# Altium PCB PCB3.PcbDoc
Units mm, origin at the board's own origin, x right, y up, seen from the top; angles counter-clockwise.
Board outline 95.25 x 46.35 mm, 2 copper layers (Top Layer, Bottom Layer); 134 components, 118 nets, 415 pads, 19 vias.
Unrouted connection lines stored in the file: 2.
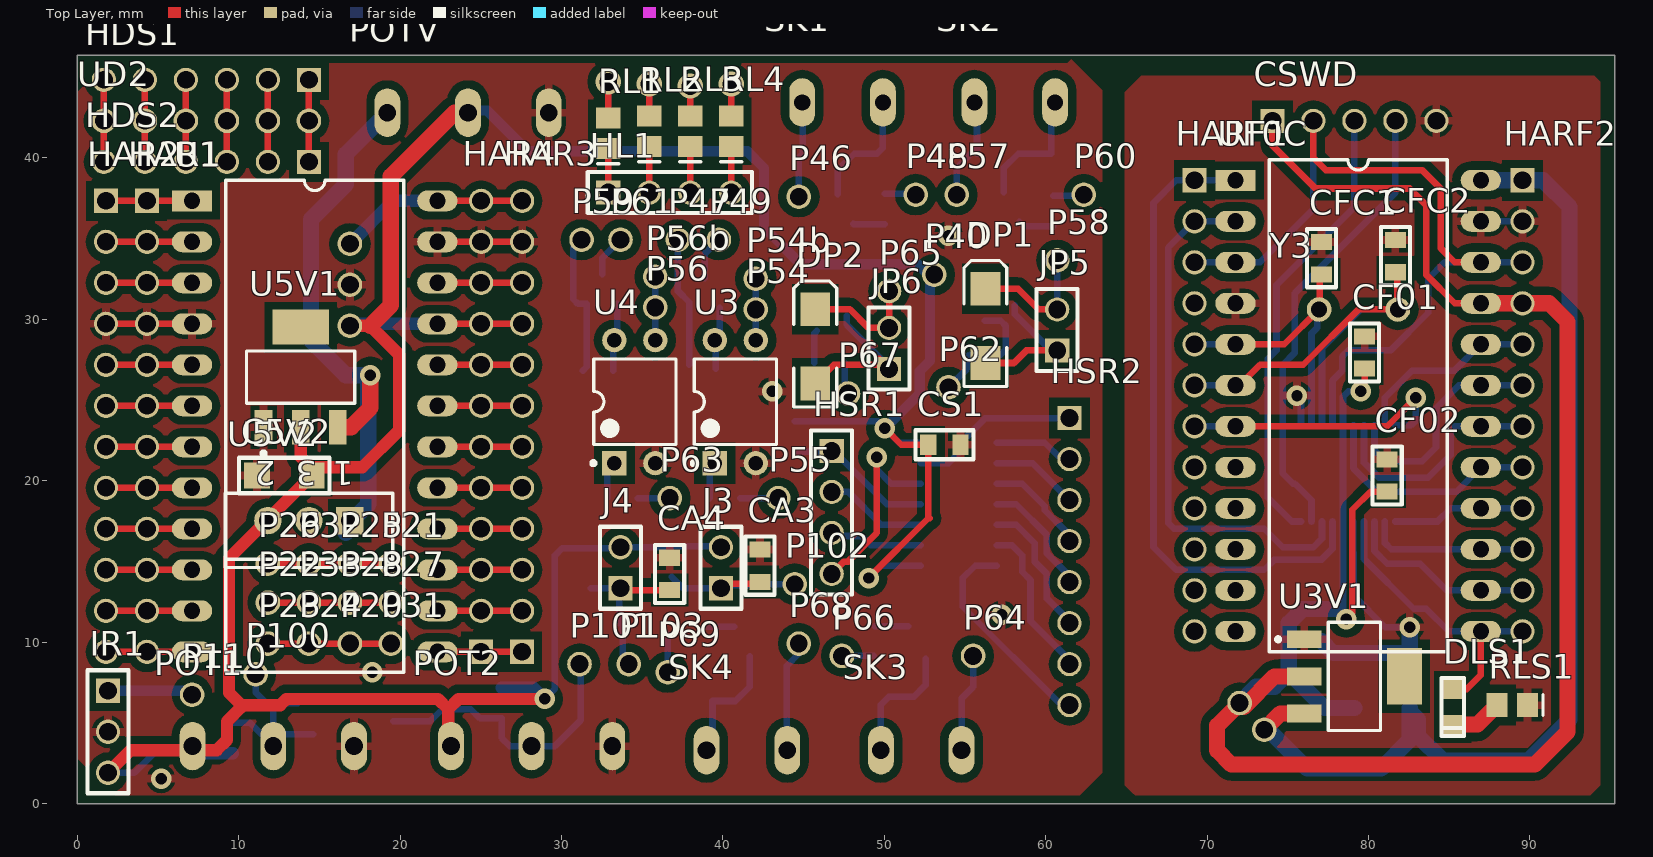
[diagram p0: Top Layer view]
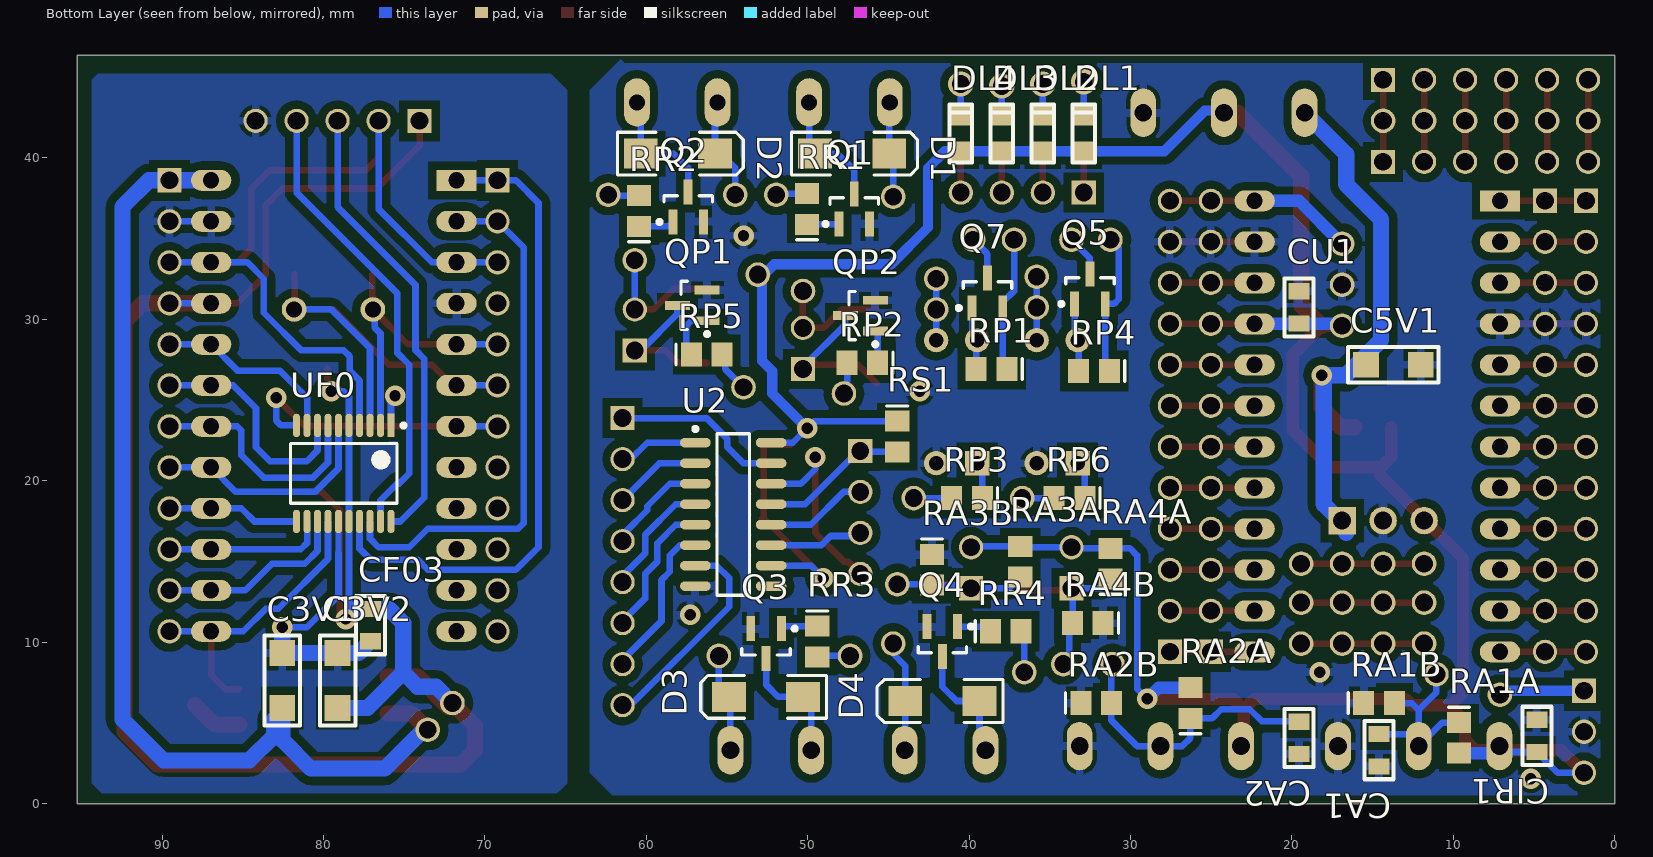
[diagram p1: Bottom Layer view, seen from below]

## Layer stack, top to bottom
Top Solder: solder mask 0.0102, Solder Resist, Dk 3.5
Top Layer: signal copper 0.0356
Dielectric 1: dielectric 0.32, FR-4, Dk 4.8
Bottom Layer: signal copper 0.0356
Bottom Solder: solder mask 0.0102, Solder Resist, Dk 3.5

## Board outline
0,0 95.25,0 95.25,46.355 0,46.355

## Design rules (kind name [scope] priority, off if disabled: settings)
AssemblyTestPointUsage [All] p1 off:
AssemblyTestpoint [All] p1 off: testpointundercomponent=TRUE minsize=1.016 maxsize=2.54 preferedsize=1.524 minholesize=0 maxholesize=1.016 preferedholesize=0.813 testpointgrid=0.025 usegrid=TRUE gridtolerance=0 allowsidetop=TRUE allowsidebottom=TRUE
Clearance [All] p1: gap=0.508
ComponentClearance [All] p1 off: gap=0.254 collisioncheckmode=3 verticalgap=0.254 showdistances=FALSE
DiffPairsRouting [All] p1 off: maxlimit=0.254 minlimit=0.254 mostfreqgap=0.254 toplayer_minwidth=0.381 toplayer_maxwidth=0.381 toplayer_prefwidth=0.381 bottomlayer_minwidth=0.381 bottomlayer_maxwidth=0.381 bottomlayer_prefwidth=0.381 maxuncoupledlength=12.7
FabricationTestPointUsage [All] p1 off: valid=0 allowmultiple=FALSE
FabricationTestpoint [All] p1 off: side=3 testpointundercomponent=TRUE minsize=1.016 maxsize=2.54 preferedsize=1.524 minholesize=0 maxholesize=1.016 preferedholesize=0.813 testpointgrid=0.025 allowsidetop=TRUE allowsidebottom=TRUE usegrid=TRUE gridtolerance=0
FanoutControl Fanout_BGA [IsBGA] p1 off: bgadir=Out bgaviamode=Centered fanoutstyle=Auto fanoutdirection=Alternating viagrid=0.025 // Fanout_BGA (Default Rule)
FanoutControl Fanout_LCC [IsLCC] p2 off: bgadir=Out bgaviamode=Centered fanoutstyle=Auto fanoutdirection=Alternating viagrid=0.025 // Fanout_LCC (Default Rule)
FanoutControl Fanout_SOIC [IsSOIC] p3 off: bgadir=Out bgaviamode=Centered fanoutstyle=Auto fanoutdirection=Alternating viagrid=0.025 // Fanout_SOIC (Default Rule)
FanoutControl Fanout_Small [(CompPinCount < 5)] p4 off: bgadir=Out bgaviamode=Centered fanoutstyle=Auto fanoutdirection=OutThenIn viagrid=0.025 // Fanout_Small (Default Rule)
FanoutControl Fanout_Default [All] p5 off: bgadir=Out bgaviamode=Centered fanoutstyle=Auto fanoutdirection=Alternating viagrid=0.025 // Fanout_Default (Default Rule)
Height [All] p1 off: minheight=0 maxheight=25.4 prefheight=12.7
HoleSize [All] p1 off: absolutevalues=TRUE maxlimit=2.54 minlimit=0.025 maxpercent=80.000 minpercent=20.000
HoleToHoleClearance [All] p1 off: gap=0.254 allowstackedmicrovias=TRUE
LayerPairs [All] p1 off: enforce=TRUE
MinimumSolderMaskSliver [All] p1 off: minsoldermaskwidth=0.254
NetAntennae [All] p1 off: netantennaetolerance=0
PasteMaskExpansion [All] p1 off: expansion=0
PlaneConnect [All] p1: planeconnectstyle=Relief reliefexpansion=0.508 reliefentries=4 reliefconductorwidth=0.508 reliefairgap=0.254
PolygonConnect [All] p1: connectstyle=Relief reliefconductorwidth=0.508 reliefentries=4 polygonreliefangle="90 Angle" airgapwidth=0.254
RoutingCorners [All] p1 off: cornerstyle=45-Degree minsetback=2.54 maxsetback=2.54
RoutingLayers [All] p1 off: top layer_v5=TRUE bottom layer_v5=TRUE
RoutingPriority [All] p1 off: routingpriority=0
RoutingTopology [All] p1 off: topology=Shortest
RoutingVias [All] p1 off: holewidth=0.711 width=1.27 viastyle="Through Hole" minholewidth=0.711 minwidth=1.27 maxholewidth=0.711 maxwidth=1.27
SilkToBoardRegionClearance [All] p1 off:
SilkToSilkClearance [All] p1 off: silktosilkclearance=0.254
SilkToSolderMaskClearance [IsPad] p1 off: minsilkscreentomaskgap=0.254 clearancetoexposedcopper=TRUE
SolderMaskExpansion [All] p1 off: expansion=0.102
UnRoutedNet [All] p1 off:
UnpouredPolygon [All] p1 off: allowunpoured=FALSE
Width [All] p1: maxlimit=1.27 minlimit=0.406 preferedwidth=0.406
2 further rules are at their usual default settings.

## Classes and differential pairs
component class Sheet2: CA1 CA2 CA3 CA4 D1 D2 D3 D4 DL1 DL2 DL3 DL4 DP1 DP2 HL1 J3 J4 JP5 JP6 P46 P47 P48 P49 P54 P54b P55 P56 P56b P57 P58 P59 P60 P61 P62 P63 P64 P65 P66 P67 P68 P69 P100 P101 P102 P103 POT2 POTV Q1 Q2 Q3 Q4 Q5 Q7 QP1 QP2 RA1A RA1B RA2A RA2B RA3A RA3B RA4A RA4B RL1 RL2 RL3 RL4 RP1 RP2 RP3 RP4 RP5 RP6 RR1 RR2 RR3 RR4 SK1 SK2 SK3 SK4 U3 U4
component class Sheet1: C5V1 C5V2 CIR1 CS1 CU1 HAR1 HAR2 HAR3 HAR4 HDS1 HDS2 HSR1 HSR2 IR1 P20 P21 P22 P23 P24 P25 P26 P27 P28 P31 P32 P33 P40 P110 POTV RS1 U1 U2 U5V1 U5V2 UD2
component class Sheet3: C3V1 C3V2 CF01 CF02 CF03 CFC1 CFC2 CSWD DLS1 HARF1 HARF2 RLS1 U3V1 UF0 UF0C Y3

## Components (designator, comment, footprint, x,y, rotation, side; value= is the part's Value field where it differs from the comment)
C3V1 "100nF" FP_1206_CAP_125 82.55,7.62 r90 bottom
C3V2 "100nF" FP_1206_CAP_125 79.121,7.62 r90 bottom
C5V1 "100nF" FP_1206_CAP_125 13.716,27.178 r180 bottom
C5V2 "100nF" FP_1206_CAP_125 12.827,20.32 r180 top
CA1 "100nF" FP_0805_CAP_085 14.605,3.302 r90 bottom
CA2 "100nF" FP_0805_CAP_085 19.558,4.064 r90 bottom
CA3 "100nF" FP_0805_CAP_085 42.291,14.732 r270 top
CA4 "100nF" FP_0805_CAP_085 36.703,14.224 r270 top
CF01 "100nF" FP_0805_CAP_085 79.756,27.94 r270 top
CF02 "100nF" FP_0805_CAP_085 81.153,20.32 r270 top
CF03 "100nF" FP_0805_CAP_085 77.089,11.049 r90 bottom
CFC1 "100nF" FP_0805_CAP_085 77.089,33.782 r90 top
CFC2 "100nF" FP_0805_CAP_085 81.661,33.909 r90 top
CIR1 "100nF" FP_0805_CAP_085 4.826,4.191 r270 bottom
CS1 "100nF" FP_0805_CAP_085 53.721,22.225 r180 top
CSWD "Header5_1" HEADER5x1 74.041,42.291 r90 top
CU1 "100nF" FP_0805_CAP_085 19.558,30.734 r270 bottom
D1 "Diode" DO214 47.244,40.259 r180 bottom
D2 "Diode" DO214 58.039,40.259 r180 bottom
D3 "Diode" DO214 52.578,6.604 r0 bottom
D4 "Diode" DO214 41.656,6.35 r0 bottom
DL1 "LED" FP_0805_LED_RED 32.893,40.513 r90 bottom
DL2 "LED" FP_0805_LED_RED 35.433,40.513 r90 bottom
DL3 "LED" FP_0805_LED_RED 37.973,40.513 r90 bottom
DL4 "LED" FP_0805_LED_RED 40.513,40.513 r90 bottom
DLS1 "LED" FP_0805_LED_RED 85.217,6.985 r270 top
DP1 "Diode" DO214 56.261,29.591 r90 top
DP2 "Diode" DO214 45.72,28.321 r90 top
HAR1 "Header12_1" HEADER12x1 4.318,37.338 r0 top
HAR2 "Header12_1" HEADER12x1 1.778,37.338 r0 top
HAR3 "Header12_1" HEADER12x1 27.559,9.398 r180 top
HAR4 "Header12_1" HEADER12x1 25.019,9.398 r180 top
HARF1 "Header12_1" HEADER12x1 69.215,38.608 r0 top
HARF2 "Header12_1" HEADER12x1 89.535,38.608 r0 top
HDS1 "Header6" HEADER6x1 14.351,44.831 r270 top
HDS2 "Header6" HEADER6x1 14.351,39.751 r270 top
HL1 "Header4" FP_CONN4_TUSKE_254MM 32.893,37.846 r270 top
HSR1 "Header4" FP_CONN4_TUSKE_254MM 46.736,21.844 r180 top
HSR2 "Header8_1" HEADER8x1 61.468,23.876 r0 top
IR1 "IR_REC" FP_CONN3_TUSKE_254MM 1.905,6.985 r180 top
J3 "JUMPER" FP_CONN2_TUSKE_254MM 39.878,13.335 r0 top
J4 "JUMPER" FP_CONN2_TUSKE_254MM 33.655,13.335 r0 top
JP5 "JUMPER" FP_CONN2_TUSKE_254MM 60.706,28.067 r0 top
JP6 "JUMPER" FP_CONN2_TUSKE_254MM 50.292,26.924 r0 top
P20 "1Pin" Header1 16.891,9.906 r90 top
P21 "1Pin" Header1 19.431,14.859 r0 top
P22 "1Pin" Header1 11.811,12.446 r90 top
P23 "1Pin" Header1 11.811,9.906 r90 top
P24 "1Pin" Header1 14.351,9.906 r90 top
P25 "1Pin" Header1 16.891,14.859 r90 top
P26 "1Pin" Header1 11.811,14.859 r90 top
P27 "1Pin" Header1 19.431,12.446 r90 top
P28 "1Pin" Header1 16.891,12.446 r90 top
P31 "1Pin" Header1 19.431,9.906 r0 top
P32 "1Pin" Header1 14.351,14.859 r90 top
P33 "1Pin" Header1 14.351,12.446 r90 top
P40 "1Pin" Header1 53.086,32.766 r90 top
P46 "1Pin" Header1 44.704,37.592 r180 top
P47 "1Pin" Header1 37.211,34.925 r90 top
P48 "1Pin" Header1 51.943,37.719 r180 top
P49 "1Pin" Header1 39.751,34.925 r90 top
P54 "1Pin" Header1 42.037,30.607 r90 top
P54b "1Pin" Header1 42.037,32.512 r90 top
P55 "1Pin" Header1 43.434,18.923 r90 top
P56 "1Pin" Header1 35.814,30.734 r90 top
P56b "1Pin" Header1 35.814,32.639 r90 top
P57 "1Pin" Header1 54.483,37.719 r180 top
P58 "1Pin" Header1 60.706,33.655 r90 top
P59 "1Pin" Header1 31.242,34.925 r90 top
P60 "1Pin" Header1 62.357,37.719 r180 top
P61 "1Pin" Header1 33.655,34.925 r0 top
P62 "1Pin" Header1 53.975,25.781 r90 top
P63 "1Pin" Header1 36.703,18.923 r90 top
P64 "1Pin" Header1 55.499,9.144 r0 top
P65 "1Pin" Header1 50.292,31.75 r90 top
P66 "1Pin" Header1 47.371,9.144 r0 top
P67 "1Pin" Header1 47.752,25.4 r90 top
P68 "1Pin" Header1 44.704,9.906 r0 top
P69 "1Pin" Header1 36.576,8.128 r0 top
P100 "1Pin" Header1 11.049,8.001 r90 top
P101 "1Pin" Header1 31.115,8.636 r90 top
P102 "1Pin" Header1 44.45,13.589 r90 top
P103 "1Pin" Header1 34.163,8.636 r90 top
P110 "1Pin" Header1 7.112,6.731 r90 top
POT1 "Sorkapocs_3" SORKAPOCS_3 17.145,3.556 r180 top
POT2 "Sorkapocs_3" SORKAPOCS_3 33.147,3.556 r180 top
POTV "Sorkapocs_3" SORKAPOCS_3 29.21,42.799 r180 top
Q1 "NMOS" SOT95P245X110-3N 47.117,36.83 r90 bottom
Q2 "NMOS" SOT95P245X110-3N 57.404,36.957 r90 bottom
Q3 "NMOS" SOT95P245X110-3N 52.578,9.906 r270 bottom
Q4 "NMOS" SOT95P245X110-3N 41.656,10.033 r270 bottom
Q5 "PMOS-2" SOT95P245X110-3N 32.512,31.877 r90 bottom
Q7 "PMOS-2" SOT95P245X110-3N 38.862,31.623 r90 bottom
QP1 "NMOS" SOT95P245X110-3N 57.15,30.861 r0 bottom
QP2 "NMOS" SOT95P245X110-3N 46.736,30.226 r0 bottom
RA1A "Resistor" 0805 9.652,4.064 r270 bottom
RA1B "Resistor" 0805 14.605,6.223 r180 bottom
RA2A "Resistor" 0805 26.289,6.223 r90 bottom
RA2B "Resistor" 0805 32.131,6.223 r180 bottom
RA3A "Resistor" 0805 36.83,14.986 r90 bottom
RA3B "Resistor" 0805 42.291,14.478 r270 bottom
RA4A "Resistor" 0805 31.242,14.859 r90 bottom
RA4B "Resistor" 0805 32.639,11.176 r0 bottom
RL1 "Resistor" 0805 32.893,41.529 r90 top
RL2 "Resistor" 0805 35.433,41.656 r90 top
RL3 "Resistor" 0805 37.973,41.656 r90 top
RL4 "Resistor" 0805 40.513,41.656 r90 top
RLS1 "Resistor" 0805 88.9,6.096 r180 top
RP1 "Resistor" 0805 38.608,26.924 r0 bottom
RP2 "Resistor" 0805 46.609,27.305 r0 bottom
RP3 "Resistor" 0805 40.132,18.923 r0 bottom
RP4 "Resistor" 0805 32.258,26.797 r0 bottom
RP5 "Resistor" 0805 56.261,27.813 r180 bottom
RP6 "Resistor" 0805 33.782,18.923 r0 bottom
RR1 "Resistor" 0805 50.038,36.83 r90 bottom
RR2 "Resistor" 0805 60.452,36.703 r90 bottom
RR3 "Resistor" 0805 49.403,10.033 r270 bottom
RR4 "Resistor" 0805 37.719,10.668 r180 bottom
RS1 "Resistor" 0805 44.45,22.733 r270 bottom
SK1 "Sorkapocs_2" SORKAPOCS_2#1 49.911,43.434 r180 top
SK2 "Sorkapocs_2" SORKAPOCS_2#1 60.579,43.434 r180 top
SK3 "Sorkapocs_2" SORKAPOCS_2#2 49.784,3.302 r0 top
SK4 "Sorkapocs_2" SORKAPOCS_2#2 38.989,3.302 r0 top
U1 "ArduinoMiniPro" DIP24 7.112,37.338 r0 top
U2 "SN74HC595D" D016_L 54.61,17.907 r180 bottom
U3 "Optoisolator1" DIP-4 40.767,24.892 r90 top
U3V1 "L7805CV" SOT-223 79.121,7.874 r270 top
U4 "Optoisolator1" DIP-4 34.544,24.892 r90 top
U5V1 "L7805CV" SOT-223 13.843,26.416 r0 top
U5V2 "L7805CV" TO220ABN 14.351,17.526 r180 top
UD2 "Digispark" Digispark 9.271,35.941 r0 top
UF0 "STM32F030F4" TSSOP20 78.74,20.447 r270 bottom
UF0C "ArduinoMiniPro" DIP24 71.755,38.608 r0 top locked
Y3 "ECS-110-S-5P" Crystal 79.375,30.607 r180 top

## Footprints (in the part's own frame and the unit in brackets; to place one, negate y for a bottom-side part, rotate by r counter-clockwise, add the part's x,y. Pads: shape width x height; smd on the part's side, far side on the other; paste and mask are expansions set on the pad)
0805 [mm] "Chip Capacitor; Body 2.0 x 1.2 mm (LxW typ)"
  rect 1.3x1.5 smd: 1(-0.95,0) 2(0.95,0)
  silkscreen extent -1.9,-0.65 -1.9,0.65
Crystal [mm]
  round 1.524 hole 1: 1(-2.44,0) 2(2.44,0)
D016_L [mm] "SOIC, 16-Leads, Body 9.9x3.9mm, Pitch 1.27mm, IPC High Density"
  oval 1.9x0.6 smd: 1(-2.35,4.445) 2(-2.35,3.175) 3(-2.35,1.905) 4(-2.35,0.635) 5(-2.35,-0.635) 6(-2.35,-1.905) 7(-2.35,-3.175) 8(-2.35,-4.445) 9(2.35,-4.445) 10(2.35,-3.175) 11(2.35,-1.905) 12(2.35,-0.635) 13(2.35,0.635) 14(2.35,1.905) 15(2.35,3.175) 16(2.35,4.445)
  silkscreen extent -2.48,-5 1,5.42, body extent -1.95,-4.95 1.95,4.95, height 1.75
Digispark [mil]
  round 60 hole 43.31: 1(200,250) 2(100,250) 3(0,250) 4(-100,250) 5(-200,250) 6(-300,250) 7(300,-50) 8(300,-150) 9(300,-250)
DIP24 [mm]
  rect 2.5x1.3 hole 1: 1(0,0)
  oval 2.5x1.3 hole 1: 2(0,-2.54) 3(0,-5.08) 4(0,-7.62) 5(0,-10.16) 6(0,-12.7) 7(0,-15.24) 8(0,-17.78) 9(0,-20.32) 10(0,-22.86) 11(0,-25.4) 12(0,-27.94) 13(15.2,-27.94) 14(15.2,-25.4) 15(15.2,-22.86) 16(15.2,-20.32) 17(15.2,-17.78) 18(15.2,-15.24) 19(15.2,-12.7) 20(15.2,-10.16) 21(15.2,-7.62) 22(15.2,-5.08) 23(15.2,-2.54) 24(15.2,0)
  silkscreen extent 2.08,-29.21 13.12,1.27
DIP-4 [mm] "DIP; 4 Leads; Row Spacing 7.62 mm; Pitch 2.54 mm"
  rect 1.5x1.5 hole 0.9: 1(-3.81,1.27)
  round 1.5 hole 0.9: 2(-3.81,-1.27) 3(3.81,-1.27) 4(3.81,1.27)
  silkscreen extent -3.93,-2.55 2.65,2.69, body extent -3.15,-2.5 3.15,2.5, height 5.6
DO214 [mm] "DO-214-AC/SMA; 2 C-Bend Leads; Body 5.3 x 2.6 mm, inc. leads (LxW)"
  rect 2.1x1.85 smd: 1(-2.3,0) 2(2.3,0)
  silkscreen extent -3.75,-1.33 4.05,1.33
FP_0805_CAP_085 [mm] "0805 kapacitás YAGEO 0.85mm magas"
  rect 1x1.3 smd: 1(-1,0) 2(1,0)
  silkscreen extent -1.8,-0.9 1.8,0.9, body extent -1,-0.64 1.03,0.64, height 0.85
FP_0805_LED_RED [mm] "0805 méretû piros LED"
  rect 1.2x1.3 smd: A(-0.1,0) K(2.1,0)
  silkscreen extent -0.8,-0.7 2.8,0.7, body extent 0.01,-0.63 2.03,0.62, height 1.1
FP_1206_CAP_125 [mm] "1206 kapacitás 1.25 mm"
  rect 1.6x1.6 smd: 1(-1.7,0) 2(1.7,0)
  silkscreen extent -2.8,-1.1 2.8,1.1, body extent -1.52,-0.79 1.58,0.79, height 1.25
FP_CONN2_TUSKE_254MM [mm] "2×1 tüskesor"
  rect 1.5x1.5 hole 1.1: 1(0,0)
  round 1.5 hole 1.1: 2(0,2.54)
  silkscreen extent -1.27,-1.27 1.27,3.81, body extent -1.27,-1.27 1.27,3.81, height 8.54
FP_CONN3_TUSKE_254MM [mm] "3×1 tüskesor"
  rect 1.5x1.5 hole 1.1: 1(0,0)
  round 1.5 hole 1.1: 2(0,2.54) 3(0,5.08)
  silkscreen extent -1.27,-1.27 1.27,6.35, body extent -1.27,-1.27 1.27,6.35, height 8.54
FP_CONN4_TUSKE_254MM [mm] "4×1 tüskesor"
  rect 1.5x1.5 hole 1.1: 1(0,0)
  round 1.5 hole 1.1: 2(0,2.54) 3(0,5.08) 4(0,7.62)
  silkscreen extent -1.27,-1.27 1.27,8.9, body extent -1.27,-1.27 1.27,8.89, height 8.54
Header1 [mil]
  round 60 hole 43.31: 1(0,0)
HEADER5x1 [mm]
  rect 1.5x1.5 hole 1.1: 1(0,0)
  round 1.5 hole 1.1: 2(0,-2.54) 3(0,-5.08) 4(0,-7.62) 5(0,-10.16)
HEADER6x1 [mm]
  rect 1.5x1.5 hole 1.1: 1(0,0)
  round 1.5 hole 1.1: 2(0,-2.54) 3(0,-5.08) 4(0,-7.62) 5(0,-10.16) 6(0,-12.7)
HEADER8x1 [mm]
  rect 1.5x1.5 hole 1.1: 1(0,0)
  round 1.5 hole 1.1: 2(0,-2.54) 3(0,-5.08) 4(0,-7.62) 5(0,-10.16) 6(0,-12.7) 7(0,-15.24) 8(0,-17.78)
HEADER12x1 [mm]
  rect 1.5x1.5 hole 1.1: 1(0,0)
  round 1.5 hole 1.1: 2(0,-2.54) 3(0,-5.08) 4(0,-7.62) 5(0,-10.16) 6(0,-12.7) 7(0,-15.24) 8(0,-17.78) 9(0,-20.32) 10(0,-22.86) 11(0,-25.4) 12(0,-27.94)
SORKAPOCS_2#1 [mm]
  oval 1.6x3 hole 1: 1(0,0) 2(5,0)
SORKAPOCS_2#2 [mm]
  oval 1.6x3 hole 1.1: 1(0,0) 2(5,0)
SORKAPOCS_3 [mm]
  oval 1.6x3 hole 1.1: 1(0,0) 2(5,0) 3(10,0)
SOT95P245X110-3N [mm] "SOT23, 3-Leads, Body 3.0x2.6mm (max), Pitch 0.95mm, IPC Medium Density"
  rect 1.55x0.55 smd: 1(-0.925,0.95) 2(-0.925,-0.95) 3(0.925,0)
  silkscreen extent -1.05,-1.5 0.7,1.9, body extent -0.7,-1.5 0.7,1.5, height 1.1
SOT-223 [mm] "SOT-223/SC-73; 4 Leads; Body 6.7 x 7.3 mm, inc. leads (LxW max)"
  rect 1.1x2.15 smd: 1(-2.3,-3.1) 2(0,-3.1) 3(2.3,-3.1)
  rect 3.5x2.15 smd: 4(0,3.1)
  silkscreen extent -3.35,-4.85 3.35,1.63
TO220ABN [mm] "TO, Thru-Hole, Vertical, Heatsink Mounted; 3 In-Line Leads; Pitch 2.54 mm; Pin sequence 1, 3, 2"
  rect 1.7x1.7 hole 1.1: 1(-2.54,0)
  round 1.7 hole 1.1: 2(2.54,0) 3(0,0)
  silkscreen extent -5.2,-1.7 5.2,2.9
TSSOP20 [mm] "TSSOP, 20-Leads, Body 6,50x4,40mm, Pitch 0,65mm, IPC Medium Density"
  rect 1.45x0.45 smd: 1(-2.975,2.925)
  oval 1.45x0.45 smd: 2(-2.975,2.275) 3(-2.975,1.625) 4(-2.975,0.975) 5(-2.975,0.325) 6(-2.975,-0.325) 7(-2.975,-0.975) 8(-2.975,-1.625) 9(-2.975,-2.275) 10(-2.975,-2.925) 11(2.975,-2.925) 12(2.975,-2.275) 13(2.975,-1.625) 14(2.975,-0.975) 15(2.975,-0.325) 16(2.975,0.325) 17(2.975,0.975) 18(2.975,1.625) 19(2.975,2.275) 20(2.975,2.925)
  silkscreen extent -3.1,-3.3 1.85,3.82, body extent -3.04,-3.35 3.24,3.15, height 1.09

## Part data
C3V1 C3V2 C5V1 C5V2 CA1 CA2 CA3 CA4 CF01 CF02 CF03 CFC1 CFC2 CIR1 CS1 CU1: library part CAP, "Capacitor"
DL1 DL2 DL3 DL4 DLS1: "Typical RED GaAs LED"
IR1: library part Sorkapocs_3
J3 J4 JP5 JP6: "Jumper Wire"
Q1 Q2 Q3 Q4 QP1 QP2: "N-Channel Power MOSFET"
Q5 Q7: "P-Channel Power MOSFET"
U2: "8-Bit Shift Register with 3-State Output Registers"
U3 U4: "4-Pin Phototransistor Optocoupler"
U3V1 U5V1 U5V2: "Positive Voltage Regulator"
UF0: "STMICROELECTRONICS  STM32F030F4P6  MCU, 32BIT, CORTEX-M0, 48MHZ"
Y3: "Crystal Oscillator"

## Free pads (board coordinates)
  round 1.524 hole 1.1: 0(72.009,6.223) 0(73.533,4.572)

## Via types
v1: diameter 1.27, hole 0.711, Top Layer to Bottom Layer, 15 vias
v2: diameter 1.57, hole 1.1, Top Layer to Bottom Layer, 4 vias

## Nets (pads, with @x,y where several pads share a name; then routed paths per layer and width w, separated by ;. In a path a pad name is that pad's centre, name@x,y a point inside that pad or via, vN(x,y) a via of type N, cw(c..) or ccw(c..) an arc to the next point about the centre after c; other vN are vias at no path point)
GND: C3V1.2 C3V2.2 C5V1.2 C5V2.2 CA1.1 CA2.1 CA3.1 CA4.1 CF01.1 CF02.1 CF03.1 CFC1.2 CFC2.2 CIR1.1 CS1.1 CSWD.5 CU1.1 HAR1.4 HAR2.4 HAR3.11 HAR4.11 HARF2.2 IR1.2 POT1.1 POT2.1 POTV.1 Q1.2 Q2.2 Q3.2 Q4.2 QP1.2 QP2.2 RA1B.1 RA2B.1 RA3B.1 RA4B.1 RLS1.1 U1.4 U1.23 U2.8 U3.2 U3V1.1 U4.2 U5V1.1 U5V2.3 UD2.8 UF0.1 UF0.15 UF0C.4 UF0C.23 | length 31
  Top Layer w0.406: HAR2.4 HAR1.4 U1.4 ; U1.23 HAR4.11 HAR3.11
  Bottom Layer w0.356: 79.065,15.55 UF0.15
  Bottom Layer w0.406: UF0.1 v1@75.815,25.023 ; 79.065,15.55 79.065,12.883 81.026,10.922 v1(82.55,10.922) ; UF0C.23 HARF2.2
  Bottom Layer w1: CF03.1 77.818,9.32 C3V2.2 C3V1.2 v1(82.55,10.922)
  other v1: 5.189,1.536 18.288,8.128 57.277,11.684 75.565,25.273 43.053,25.527 53.975,35.179
Net*_1: 
Net*_3: 
Net*_4: 
Net*_5: 
NetCA1_2: CA1.2 P100.1 POT1.2 RA1A.1 RA1B.2 | length 12.5
  Bottom Layer w0.406: RA1A.1 10.687,5.014 POT1.2 ; P100.1 11.049,6.891 12.145,5.795 ; RA1B.2 12.573,6.223 12.145,5.795 ; CA1.2 12.891,4.302 POT1.2 ; POT1.2 12.145,5.795
NetCA2_2: CA2.2 P101.1 POT2.2 RA2A.1 RA2B.2 | length 18.7
  Bottom Layer w0.406: CA2.2@19.59,5.096 21.86,5.096 22.606,5.842 24.384,5.842 24.953,5.273 RA2A.1 26.289,4.064 26.797,3.556 POT2.2 29.591,3.556 31.181,5.146 RA2B.2 31.181,8.57 P101.1 ; POT2.2@27.874,4.384 28.281,3.977 POT2.2@28.556,4.252
NetCA3_2: CA3.2 J3.1 P102.1 RA3A.1 RA3B.2 | length 10.3
  Top Layer w0.406: J3.1 40.148,13.605 CA3.2@42.418,13.605
  Bottom Layer w0.406: RA3A.1 37.531,13.335 J3.1 ; J3.1@40.071,13.528 RA3B.2 ; RA3B.2@42.352,13.589 P102.1
NetCA4_2: CA4.2 J4.1 P103.1 RA4A.1 RA4B.2 | length 9.4
  Top Layer w0.406: J4.1@33.639,13.319 33.734,13.224 CA4.2
  Bottom Layer w0.406: RA4A.1@31.816,13.335 J4.1 ; RA4B.2 J4.1@33.589,13.269 ; P103.1@33.782,8.636 RA4B.2@33.782,10.983
NetCFC1_1: CFC1.1 HARF1.5 UF0.2 UF0C.5 Y3.2 | length 18.2
  Top Layer w0.406: UF0C.5 74.776,28.448 Y3.2 76.962,30.634 CFC1.1@76.962,32.782
  Bottom Layer w0.406: HARF1.5 UF0C.5 ; UF0.2 76.465,29.121 76.808,29.464 76.808,30.48 Y3.2
NetCFC2_1: CFC2.1 HARF1.6 UF0.3 UF0C.6 Y3.1 | length 27.2
  Top Layer w0.406: UF0C.6 72.009,25.908 73.279,27.178 75.946,27.178 79.375,30.607 Y3.1 81.788,30.634 CFC2.1@81.788,32.782
  Bottom Layer w0.406: HARF1.6 UF0C.6 ; UF0.3 77.115,28.22 79.502,30.607 Y3.1
NetCSWD_2: CSWD.2 HARF1.3 HARF2.3 UF0.4 UF0C.3 UF0C.22 | length 51
  Top Layer w0.406: CSWD.2 76.581,40.005 77.343,39.243 83.312,39.243 84.48,38.075 84.48,34.392 85.344,33.528 UF0C.22
  Bottom Layer w0.406: HARF1.3 UF0C.3 73.279,33.528 76.581,36.83 CSWD.2 ; UF0.4 77.765,26.203 78.359,26.797 78.359,27.686 78.74,28.067 81.358,28.067 83.693,30.402 83.693,32.512 84.709,33.528 UF0C.22 HARF2.3
NetCSWD_3: CSWD.3 UF0.20 | length 28.2
  Bottom Layer w0.406: UF0.20 75.238,17.472 73.762,18.948 73.762,27.557 74.295,28.09 74.295,32.131 79.121,36.957 CSWD.3
NetCSWD_4: CSWD.4 UF0.19 | length 28.5
  Bottom Layer w0.406: UF0.19 76.465,18.785 75.438,19.812 75.311,19.812 74.676,20.447 74.676,27.178 75.438,27.94 75.438,31.623 81.661,37.846 CSWD.4
NetD1_1: D1.1 Q1.3 SK1.1 | length 7.7
  Bottom Layer w0.406: Q1.3 47.117,39.243 48.133,40.259 D1.1 49.911,40.626 SK1.1
NetD1_2: D1.2 P46.1 SK1.2 | length 5.9
  Bottom Layer w0.406: P46.1 44.704,40.019 D1.2 SK1.2@44.944,43.401
NetD2_1: D2.1 Q2.3 SK2.1 | length 8.1
  Bottom Layer w0.406: Q2.3 57.404,39.37 58.293,40.259 D2.1 60.339,43.194 SK2.1
NetD2_2: D2.2 P57.1 SK2.2 | length 6.2
  Bottom Layer w0.406: P57.1 54.483,39.384 D2.2@55.428,40.329 ; SK2.2 55.739,43.274 D2.2
NetD3_1: D3.1 Q3.3 SK3.1 | length 7.7
  Bottom Layer w0.406: SK3.1 49.784,6.11 D3.1 51.816,6.604 52.578,7.366 Q3.3
NetD3_2: D3.2 P64.1 SK3.2 | length 6.1
  Bottom Layer w0.406: SK3.2 54.784,6.51 D3.2 55.499,7.225 P64.1
NetD4_1: D4.1 Q4.3 SK4.1 | length 7.2
  Bottom Layer w0.406: SK4.1@39.356,3.669 D4.1 40.767,6.35 41.656,7.239 Q4.3
NetD4_2: D4.2 P68.1 SK4.2 | length 6.9
  Bottom Layer w0.406: SK4.2@43.956,3.335 D4.2 43.956,8.523 44.704,9.271 P68.1
NetDL1_2: DL1.K RL1.2 | length 4.5
  Top Layer w0.406: RL1.2@32.766,42.606 RL1.2 v2(32.893,44.704)
  Bottom Layer w0.406: DL1.K v2(32.893,44.704)
NetDL2_2: DL2.K RL2.2 | length 3.9
  Top Layer w0.406: RL2.2 v2(35.433,44.577)
  Bottom Layer w0.406: DL2.K v2(35.433,44.577)
NetDL3_2: DL3.K RL3.2 | length 3.7
  Top Layer w0.406: RL3.2 v2(37.973,44.45)
  Bottom Layer w0.406: DL3.K v2(37.973,44.45)
NetDL4_2: DL4.K RL4.2 | length 3.9
  Top Layer w0.406: RL4.2 v2(40.513,44.577)
  Bottom Layer w0.406: DL4.K v2(40.513,44.577)
NetDLS1_1: DLS1.A HARF2.12 UF0.14 UF0C.13 | length 18.4
  Top Layer w0.406: DLS1.A 86.079,7.085 86.955,7.961 UF0C.13
  Bottom Layer w0.406: UF0.14 79.715,15.154 82.804,12.065 83.566,12.065 84.963,10.668 86.424,10.668 UF0C.13@86.424,10.516 ; UF0C.13 HARF2.12
NetDLS1_2: DLS1.K RLS1.2 | length 3.2
  Top Layer w1: DLS1.K 86.739,4.885 RLS1.2
NetDP1_1: DP1.1 JP5.1 QP1.3 | length 8.9
  Top Layer w0.406: DP1.1 58.025,27.291 58.801,28.067 JP5.1
  Bottom Layer w0.406: QP1.3 58.075,30.317 60.325,28.067 JP5.1
NetDP1_2: DP1.2 JP5.2 P58.1 | length 8
  Top Layer w0.406: DP1.2 58.279,31.891 59.563,30.607 JP5.2
  Bottom Layer w0.406: JP5.2 P58.1
NetDP2_1: DP2.1 JP6.1 QP2.3 | length 9.2
  Top Layer w0.406: DP2.1 46.877,27.178 49.671,27.178 JP6.1@49.671,27.545
  Bottom Layer w0.406: QP2.3 47.661,29.682 50.292,27.051 JP6.1
NetDP2_2: DP2.2 JP6.2 P65.1 | length 7.6
  Top Layer w0.406: DP2.2 47.865,30.621 49.022,29.464 JP6.2 P65.1@50.292,32.004
NetHAR1_1: HAR1.1 HAR2.1 U1.1 | length 5.3
  Top Layer w0.406: HAR2.1 HAR1.1 U1.1
NetHAR1_2: HAR1.2 HAR2.2 U1.2 | length 5.3
  Top Layer w0.406: HAR2.2 HAR1.2 U1.2
NetHAR1_3: HAR1.3 HAR2.3 HAR3.10 HAR4.10 U1.3 U1.22 | length 10.8
  Top Layer w0.406: HAR2.3 HAR1.3 U1.3 ; U1.22 HAR4.10 HAR3.10@27.813,32.258
NetHAR1_5: HAR1.5 HAR2.5 U1.5 | length 5.3
  Top Layer w0.406: HAR2.5 HAR1.5 U1.5
NetHAR1_6: HAR1.6 HAR2.6 U1.6 | length 5.3
  Top Layer w0.406: HAR2.6 HAR1.6 U1.6
NetHAR1_7: HAR1.7 HAR2.7 U1.7 | length 5.3
  Top Layer w0.406: HAR2.7 HAR1.7 U1.7
NetHAR1_8: HAR1.8 HAR2.8 U1.8 | length 5.3
  Top Layer w0.406: HAR2.8 HAR1.8 U1.8
NetHAR1_9: HAR1.9 HAR2.9 U1.9 | length 5.3
  Top Layer w0.406: HAR2.9 HAR1.9 U1.9
NetHAR1_10: HAR1.10 HAR2.10 U1.10 | length 5.3
  Top Layer w0.406: HAR2.10 HAR1.10 U1.10
NetHAR1_11: HAR1.11 HAR2.11 U1.11 | length 5.3
  Top Layer w0.406: HAR2.11 HAR1.11 U1.11
NetHAR1_12: HAR1.12 HAR2.12 U1.12 | length 5.3
  Top Layer w0.406: HAR2.12 HAR1.12 U1.12
NetHAR3_1: HAR3.1 HAR4.1 U1.13 | length 5.2
  Top Layer w0.406: U1.13 HAR4.1 HAR3.1
NetHAR3_2: HAR3.2 HAR4.2 U1.14 | length 5.2
  Top Layer w0.406: U1.14 HAR4.2 HAR3.2
NetHAR3_3: HAR3.3 HAR4.3 U1.15 | length 5.2
  Top Layer w0.406: U1.15 HAR4.3 HAR3.3
NetHAR3_4: HAR3.4 HAR4.4 U1.16 | length 5.2
  Top Layer w0.406: U1.16 HAR4.4 HAR3.4
NetHAR3_5: HAR3.5 HAR4.5 U1.17 | length 5.2
  Top Layer w0.406: U1.17 HAR4.5 HAR3.5
NetHAR3_6: HAR3.6 HAR4.6 U1.18 | length 5.2
  Top Layer w0.406: U1.18 HAR4.6 HAR3.6
NetHAR3_7: HAR3.7 HAR4.7 U1.19 | length 5.2
  Top Layer w0.406: U1.19 HAR4.7 HAR3.7
NetHAR3_8: HAR3.8 HAR4.8 U1.20 | length 5.2
  Top Layer w0.406: U1.20 HAR4.8 HAR3.8
NetHARF1_1: HARF1.1 UF0.17 UF0C.1 | length 40.9
  Bottom Layer w0.406: UF0C.1 HARF1.1 68.072,38.608 66.675,37.211 66.675,15.875 68.072,14.478 73.533,14.478 74.168,15.113 77.089,15.113 77.765,15.789 UF0.17
NetHARF1_2: HARF1.2 UF0.18 UF0C.2 | length 33.3
  Bottom Layer w0.406: UF0C.2 HARF1.2 67.589,34.442 67.589,17.374 67.945,17.018 73.533,17.018 74.676,15.875 76.581,15.875 77.115,16.409 UF0.18
NetHARF1_7: HARF1.7 UF0.10 UF0C.7 | length 17.3
  Top Layer w0.406: UF0C.7 81.153,23.368 v1(82.931,25.146)
  Bottom Layer w0.406: HARF1.7 UF0C.7 ; UF0.10 82.623,23.422 82.931,23.73 v1(82.931,25.146)
NetHARF2_5: HARF2.5 UF0.9 UF0C.20 | length 11.6
  Bottom Layer w0.406: UF0.9 81.015,25.135 82.702,26.822 85.329,26.822 UF0C.20 HARF2.5
NetHARF2_6: HARF2.6 UF0.8 UF0C.19 | length 14.4
  Bottom Layer w0.406: UF0.8 80.365,21.87 81.026,21.209 83.312,21.209 84.176,22.073 84.176,24.486 85.598,25.908 UF0C.19 HARF2.6
NetHARF2_7: HARF2.7 UF0.7 UF0C.18 | length 14.7
  Bottom Layer w0.406: UF0.7 79.715,21.123 80.645,20.193 83.693,20.193 85.09,21.59 85.09,23.114 85.344,23.368 UF0C.18 HARF2.7
NetHARF2_8: HARF2.8 UF0.6 UF0C.17 | length 14.4
  Bottom Layer w0.406: UF0.6 79.065,20.757 80.518,19.304 85.431,19.304 UF0C.17 HARF2.8
NetHARF2_9: HARF2.9 UF0.11 UF0C.16 | length 8.2
  Bottom Layer w0.406: UF0.11 84.274,17.472 85.09,18.288 UF0C.16 HARF2.9
NetHARF2_10: HARF2.10 UF0.12 UF0C.15 | length 10
  Bottom Layer w0.406: UF0.12 81.015,16.14 81.407,15.748 UF0C.15 HARF2.10
NetHARF2_11: HARF2.11 UF0.13 UF0C.14 | length 12
  Bottom Layer w0.406: UF0.13 80.365,15.647 81.153,14.859 83.185,14.859 84.836,13.208 UF0C.14 HARF2.11
NetHDS1_1: HDS1.1 HDS2.1 UD2.1 | length 5.1
  Top Layer w0.406: HDS2.1 UD2.1 HDS1.1
NetHDS1_2: HDS1.2 HDS2.2 UD2.2 | length 5.1
  Top Layer w0.406: HDS2.2 UD2.2 HDS1.2
NetHDS1_3: HDS1.3 HDS2.3 UD2.3 | length 5.1
  Top Layer w0.406: HDS2.3 UD2.3 HDS1.3
NetHDS1_4: HDS1.4 HDS2.4 UD2.4 | length 5.1
  Top Layer w0.406: HDS2.4 UD2.4 HDS1.4
NetHDS1_5: HDS1.5 HDS2.5 UD2.5 | length 5.1
  Top Layer w0.406: HDS2.5 UD2.5 HDS1.5
NetHDS1_6: HDS1.6 HDS2.6 UD2.6 | length 5.1
  Top Layer w0.406: HDS2.6 UD2.6 HDS1.6
NetHL1_1: HL1.1 RL1.1 | length 2.7
  Top Layer w0.406: HL1.1 RL1.1
NetHL1_2: HL1.2 RL2.1 | length 2.9
  Top Layer w0.406: HL1.2 RL2.1
NetHL1_3: HL1.3 RL3.1 | length 2.9
  Top Layer w0.406: HL1.3 RL3.1
NetHL1_4: HL1.4 RL4.1 | length 2.9
  Top Layer w0.406: HL1.4 RL4.1
NetHSR1_1: HSR1.1 RS1.2 U2.13 | length 9.2
  Top Layer w0.406: HSR1.1 HSR1.1@46.863,21.844
  Bottom Layer w0.406: RS1.2 HSR1.1@46.675,21.783 ; HSR1.1 46.863,21.844 50.165,18.542 U2.13
NetHSR1_2: HSR1.2 U2.12 | length 6.4
  Bottom Layer w0.406: HSR1.2 47.775,19.304 49.807,17.272 U2.12
NetHSR1_3: HSR1.3 U2.11 | length 5.8
  Bottom Layer w0.406: HSR1.3 46.926,16.573 48.578,16.573 49.149,16.002 U2.11
NetHSR1_4: HSR1.4 U2.14 | length 12.4
  Top Layer w0.406: HSR1.4 47.498,14.986 47.752,14.986 49.53,16.764 v1(49.53,21.463)
  Bottom Layer w0.406: v1(49.53,21.463) 49.53,20.701 50.419,19.812 U2.14
NetHSR2_1: HSR2.1 U2.15 | length 10.7
  Bottom Layer w0.406: U2.15 53.975,21.082 54.991,22.098 54.991,22.606 56.261,23.876 HSR2.1
NetHSR2_2: HSR2.2 U2.1 | length 4.4
  Bottom Layer w0.406: U2.1 59.944,22.352 HSR2.2@60.96,21.336
NetHSR2_3: HSR2.3 U2.2 | length 5.2
  Bottom Layer w0.406: U2.2 59.182,21.082 60.96,19.304 HSR2.3@60.96,18.796
NetHSR2_4: HSR2.4 U2.3 | length 6.2
  Bottom Layer w0.406: U2.3 58.547,19.812 59.944,18.415 59.944,18.161 61.277,16.828 HSR2.4@60.96,16.51
NetHSR2_5: HSR2.5 U2.4 | length 7.6
  Bottom Layer w0.406: U2.4 58.166,18.542 60.071,16.637 60.071,15.494 61.404,14.16 HSR2.5@60.96,13.716
NetHSR2_6: HSR2.6 U2.5 | length 8.4
  Bottom Layer w0.406: U2.5 58.166,17.272 59.309,16.129 59.309,14.986 60.071,14.224 60.071,12.7 HSR2.6@61.341,11.43
NetHSR2_7: HSR2.7 U2.6 | length 9.7
  Bottom Layer w0.406: U2.6 57.912,16.002 58.547,15.367 58.547,14.351 59.055,13.843 59.055,11.303 61.341,9.017 HSR2.7@61.341,8.636
NetHSR2_8: HSR2.8 U2.7 | length 13.3
  Bottom Layer w0.406: U2.7 55.626,14.732 54.864,13.97 54.864,12.192 60.96,6.096 HSR2.8
NetIR1_1: IR1.1 P110.1 | length 5.3
  Bottom Layer w0.635: IR1.1 6.858,6.985 P110.1
NetJP9_2: 
NetJP10_1: 
NetP20_1: P20.1 P23.1 P24.1 P31.1 | length 7.6
  Top Layer w0.406: P23.1 P24.1 P20.1 P31.1
NetP21_1: P21.1 P25.1 P26.1 P32.1 | length 7.6
  Top Layer w0.406: P26.1 P32.1 P25.1 P21.1
NetP22_1: P22.1 P27.1 P28.1 P33.1 | length 7.6
  Top Layer w0.406: P22.1 P33.1 P28.1 P27.1
NetP47_1: P47.1 Q7.2 RP1.1 | length 8
  Bottom Layer w0.406: P47.1 37.211,31.75 37.912,31.049 Q7.2 RP1.1@37.912,27.178
NetP48_1: P48.1 RR1.2 | length 1.9
  Bottom Layer w0.406: RR1.2 51.882,37.78 P48.1
NetP49_1: P49.1 Q7.3 | length 2.7
  Bottom Layer w0.406: Q7.3 38.862,34.036 P49.1
NetP54_1: P54.1 P54b.1 U3.3 | length 3.8
  Bottom Layer w0.406: U3.3 P54.1 P54b.1
NetP55_1: P55.1 RP3.2 | length 2.4
  Bottom Layer w0.406: RP3.2 P55.1
NetP56_1: P56.1 P56b.1 U4.3 | length 3.9
  Bottom Layer w0.406: U4.3 P56.1 P56b.1
NetP59_1: P59.1 Q5.2 RP4.1 | length 9.1
  Bottom Layer w0.406: P59.1 30.734,34.417 30.734,31.242 31.024,30.952 Q5.2 31.562,27.051 RP4.1
NetP60_1: P60.1 RR2.2 | length 1.9
  Bottom Layer w0.406: RR2.2 62.291,37.653 P60.1
NetP61_1: P61.1 Q5.3 | length 2.6
  Bottom Layer w0.406: Q5.3 32.512,33.782 P61.1
NetP62_1: P62.1 RP5.2 | length 2.6
  Bottom Layer w0.406: P62.1 55.118,26.924 55.118,27.62 RP5.2
NetP63_1: P63.1 RP6.2 | length 2
  Bottom Layer w0.406: RP6.2 P63.1
NetP66_1: P66.1 RR3.2 | length 2
  Bottom Layer w0.406: P66.1 RR3.2@49.342,9.144
NetP67_1: P67.1 RP2.2 | length 2.4
  Bottom Layer w0.406: RP2.2 47.559,25.72 P67.1@48.133,25.146
NetP69_1: P69.1 RR4.2 | length 2.3
  Bottom Layer w0.406: P69.1 RR4.2@36.576,10.475
NetQ1_G: Q1.1 RR1.1 | length 2
  Bottom Layer w0.406: Q1.1 48.092,35.88 RR1.1
NetQ2_G: Q2.1 RR2.1 | length 2.2
  Bottom Layer w0.406: Q2.1 58.633,35.753 RR2.1
NetQ3_G: Q3.1 RR3.1 | length 2.1
  Bottom Layer w0.406: RR3.1 Q3.1@51.476,10.983
NetQ4_G: Q4.1 RR4.1 | length 1.7
  Bottom Layer w0.406: RR4.1@38.959,10.958 Q4.1
NetQ5_G: Q5.1 RP4.2 U4.4 | length 4.3
  Bottom Layer w0.406: RP4.2 33.208,28.636 U4.4 33.462,28.89 Q5.1
NetQ7_G: Q7.1 RP1.2 U3.4 | length 3.8
  Bottom Layer w0.406: RP1.2 U3.4@39.558,28.448 ; U3.4@39.812,28.448 Q7.1
NetQP1_G: QP1.1 RP5.1 | length 3.3
  Bottom Layer w0.406: QP1.1 57.211,29.911 57.531,29.591 57.531,28.133 RP5.1
NetQP2_G: QP2.1 RP2.1 | length 2
  Bottom Layer w0.406: RP2.1 45.659,29.124 QP2.1
NetRP3_1: RP3.1 U3.1 | length 1.8
  Bottom Layer w0.406: RP3.1 U3.1@39.182,20.767
NetRP6_1: RP6.1 U4.1 | length 1.7
  Bottom Layer w0.406: RP6.1 U4.1@32.832,20.64
VCC: C5V2.1 CIR1.2 CS1.2 CU1.2 DL1.A DL2.A DL3.A DL4.A HAR3.9 HAR4.9 IR1.3 J3.2 J4.2 P40.1 POT1.3 POT2.3 POTV.2 RA1A.2 RA2A.2 RA3A.2 RA4A.2 RS1.1 U1.21 U2.10 U2.16 U5V1.2 U5V2.2 UD2.9 | length 194.5
  Top Layer w0.406: U1.21 HAR4.9 HAR3.9 ; v1(49.022,13.97) 52.721,17.669 ; v1(50.038,23.241) 51.054,22.225 CS1.2 52.721,17.669 ; 52.816,17.669 52.721,17.669
  Top Layer w0.762: IR1.3 3.302,3.302 8.636,3.302 9.271,3.937 9.271,5.08 10.16,5.969 10.16,6.096 ; U5V1.2 13.843,21.463 C5V2.1@14.478,20.828 ; C5V2.1 9.398,15.191 9.398,6.858 10.16,6.096 ; C5V2.1@14.527,20.828 17.653,20.828 19.939,23.114 19.939,27.813 18.161,29.591 UD2.9 ; POT2.3 22.987,3.716 22.987,5.842 ; 23.368,42.799 POTV.2 ; v1(28.956,6.477) 23.622,6.477 22.987,5.842 ; 10.16,6.096 12.573,6.096 12.954,6.477 22.352,6.477 22.987,5.842
  Top Layer w1.016: 18.161,29.591 19.431,30.861 19.431,38.862 23.368,42.799
  Bottom Layer w0.406: IR1.3 3.54,1.905 CIR1.2 POT1.3@7.145,3.191 ; UD2.9 UD2.9@17.018,29.718 ; v1(28.956,6.477) 29.591,7.112 29.591,15.367 30.033,15.809 RA4A.2 J4.2@33.589,15.809 ; J4.2 RA3A.2@36.769,15.875 ; RA3A.2 J3.2@39.817,15.936 ; RS1.1 49.596,23.683 v1(50.038,23.241) 50.927,22.352 U2.16 ; v1(49.022,13.97) 49.784,14.732 U2.10
  Bottom Layer w0.635: POTV.2 24.337,42.926 25.4,42.926 27.913,40.413 DL1.A DL2.A DL3.A DL4.A 41.502,40.413 42.545,39.37 42.545,35.687 44.831,33.401 52.07,33.401 52.832,32.639 52.832,27.432 52.197,26.797 52.197,25.4 v1(50.038,23.241)
  Bottom Layer w0.762: POT1.3@7.587,3.114 RA1A.2 ; UD2.9@17.018,29.718 U1.21 ; RA2A.2 28.26,7.173 v1(28.956,6.477)
VCC3: C3V2.1 CF01.2 CF02.2 CF03.2 CSWD.1 HARF2.4 pad.0@72.009,6.223 U3V1.2 UF0.5 UF0.16 UF0C.21 | length 127.5
  Top Layer w0.406: CSWD.1 74.041,40.765 76.706,38.1 82.55,38.1 83.566,37.084 83.566,32.766 85.344,30.988 UF0C.21 ; v1(78.613,11.43) 78.994,11.811 78.994,18.193 80.121,19.32 CF02.2 ; v1(79.502,25.527) 79.756,25.781 CF01.2
  Top Layer w1: pad.0@72.009,6.223 70.612,4.826 70.612,3.302 71.501,2.413 90.297,2.413 92.329,4.445 92.329,29.845 91.186,30.988 HARF2.4 UF0C.21 ; pad.0@72.263,5.969 74.168,7.874 74.422,7.874 U3V1.2
  Bottom Layer w0.406: v1(78.613,11.43) 78.415,11.628 UF0.16 UF0.5 78.415,25.202 78.756,25.543 79.74,25.543 79.756,25.559 v1@79.756,25.629 ; UF0C.21 HARF2.4
  Bottom Layer w1: pad.0@72.009,6.223 73.018,7.232 74.161,7.232 75.057,8.128 ; 77.994,12.049 CF03.2 75.93,12.049 75.057,11.176 75.057,8.128 ; C3V2.1 77.265,5.92 75.057,8.128
VRAW: HAR3.12 HAR4.12 U1.24 UD2.7 | length 11.8
  Top Layer w0.406: U1.24 HAR4.12 HAR3.12
  Bottom Layer w0.762: UD2.7 19.558,37.338 U1.24
VRAW2: C5V1.1 POTV.3 U5V1.3 U5V2.1 | length 35.4
  Top Layer w1.016: U5V1.3 16.966,23.316 18.161,24.511 v1(18.161,26.543)
  Bottom Layer w1.016: U5V2.1@16.637,16.764 16.637,17.145 18.034,18.542 18.034,26.543 16.637,26.543 14.478,28.702 14.478,36.195 16.637,38.354 16.637,40.226 POTV.3
VRAW3: C3V1.1 HARF2.1 pad.0@73.533,4.572 U3V1.3 UF0C.24 | length 66.6
  Top Layer w1: pad.0@73.533,4.572 74.535,5.574 U3V1.3
  Bottom Layer w1: pad.0@73.533,4.572 73.787,4.572 76.2,2.159 80.772,2.159 82.55,3.937 C3V1.1 82.55,5.715 83.058,5.207 83.058,4.191 84.582,2.667 89.916,2.667 92.456,5.207 92.456,36.957 90.805,38.608 HARF2.1 UF0C.24
pads on no net: HARF1.4 HARF1.8 HARF1.9 HARF1.10 HARF1.11 HARF1.12 U2.9 U3V1.4 U5V1.4 UF0C.8 UF0C.9 UF0C.10 UF0C.11 UF0C.12

## Polygon pours and split planes (outlines as drawn)
GND on Top Layer "Bottom Layer-No Net" (solid, pour order 7): 0,2.794 2.032,0.762 2.286,0.508 58.42,0.508 62.103,0.508 63.246,1.651 63.5,1.905 63.5,43.307 63.5,44.196 61.595,46.101 61.341,45.847 1.524,45.847 1.524,45.593 0,44.069
GND on Top Layer "Bottom Layer-No Net" (solid, pour order 8): 64.897,44.069 64.897,1.524 64.897,1.143 65.405,0.635 65.532,0.508 93.726,0.508 94.107,0.889 94.361,1.143 94.361,44.45 94.361,44.704 93.98,45.085 93.218,45.085 65.913,45.085
GND on Bottom Layer "Bottom Layer-No Net" (solid, pour order 6): 64.897,44.196 64.897,1.651 64.897,1.27 65.405,0.762 65.532,0.635 93.726,0.635 94.107,1.016 94.361,1.27 94.361,44.577 94.361,44.831 93.98,45.212 93.218,45.212 65.913,45.212
GND on Bottom Layer "Bottom Layer-No Net" (solid, pour order 5): 0.889,41.783 0.889,1.905 2.032,0.762 2.286,0.508 58.42,0.508 62.103,0.508 63.246,1.651 63.5,1.905 63.5,43.307 63.5,44.196 61.595,46.101 61.341,45.847 1.524,45.847 1.524,45.593 0.889,44.958

## Silkscreen, mask and mechanical layers (free items; w line width, h text height)
Top Solder:
  the board outline again, w0.254
Mechanical 1:
  the board outline again, w1.2

## Text inside footprints (layer, text, board x,y; h text height)
U5V2: Top Overlay "3" at 14.851,21.201 h1.5 r180; Top Overlay "2" at 12.311,21.201 h1.5 r180; Top Overlay "1" at 17.141,21.201 h1.5 r180